# Altium PCB 595模块 外形及尺寸.PcbDoc
Units mm, origin at the board's own origin, x right, y up, seen from the top; angles counter-clockwise.
Board outline 120.14 x 102.49 mm, 2 copper layers (Top Layer, Bottom Layer); 25 components, 0 nets, 226 pads, 0 vias.
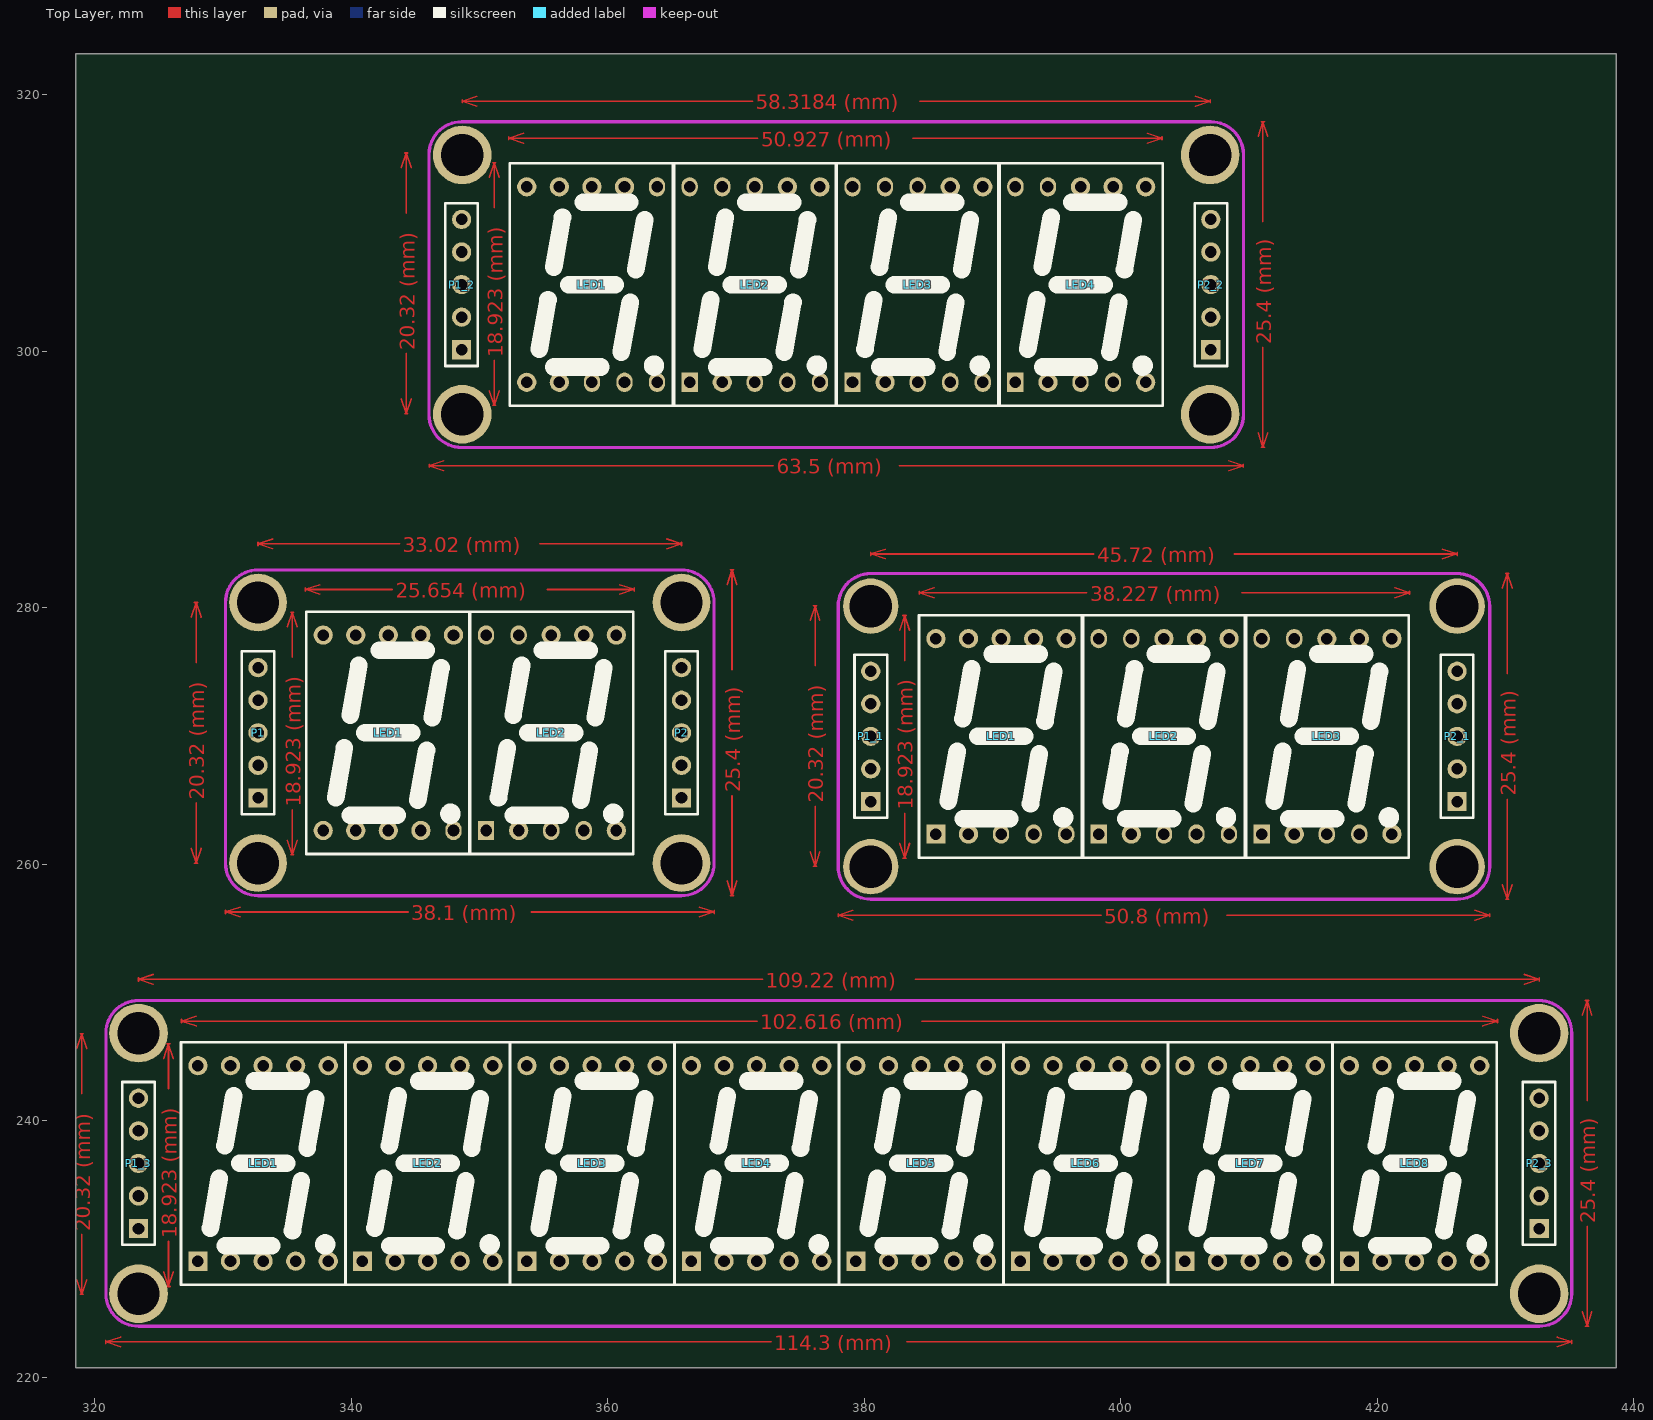
[diagram p0: Top Layer view]
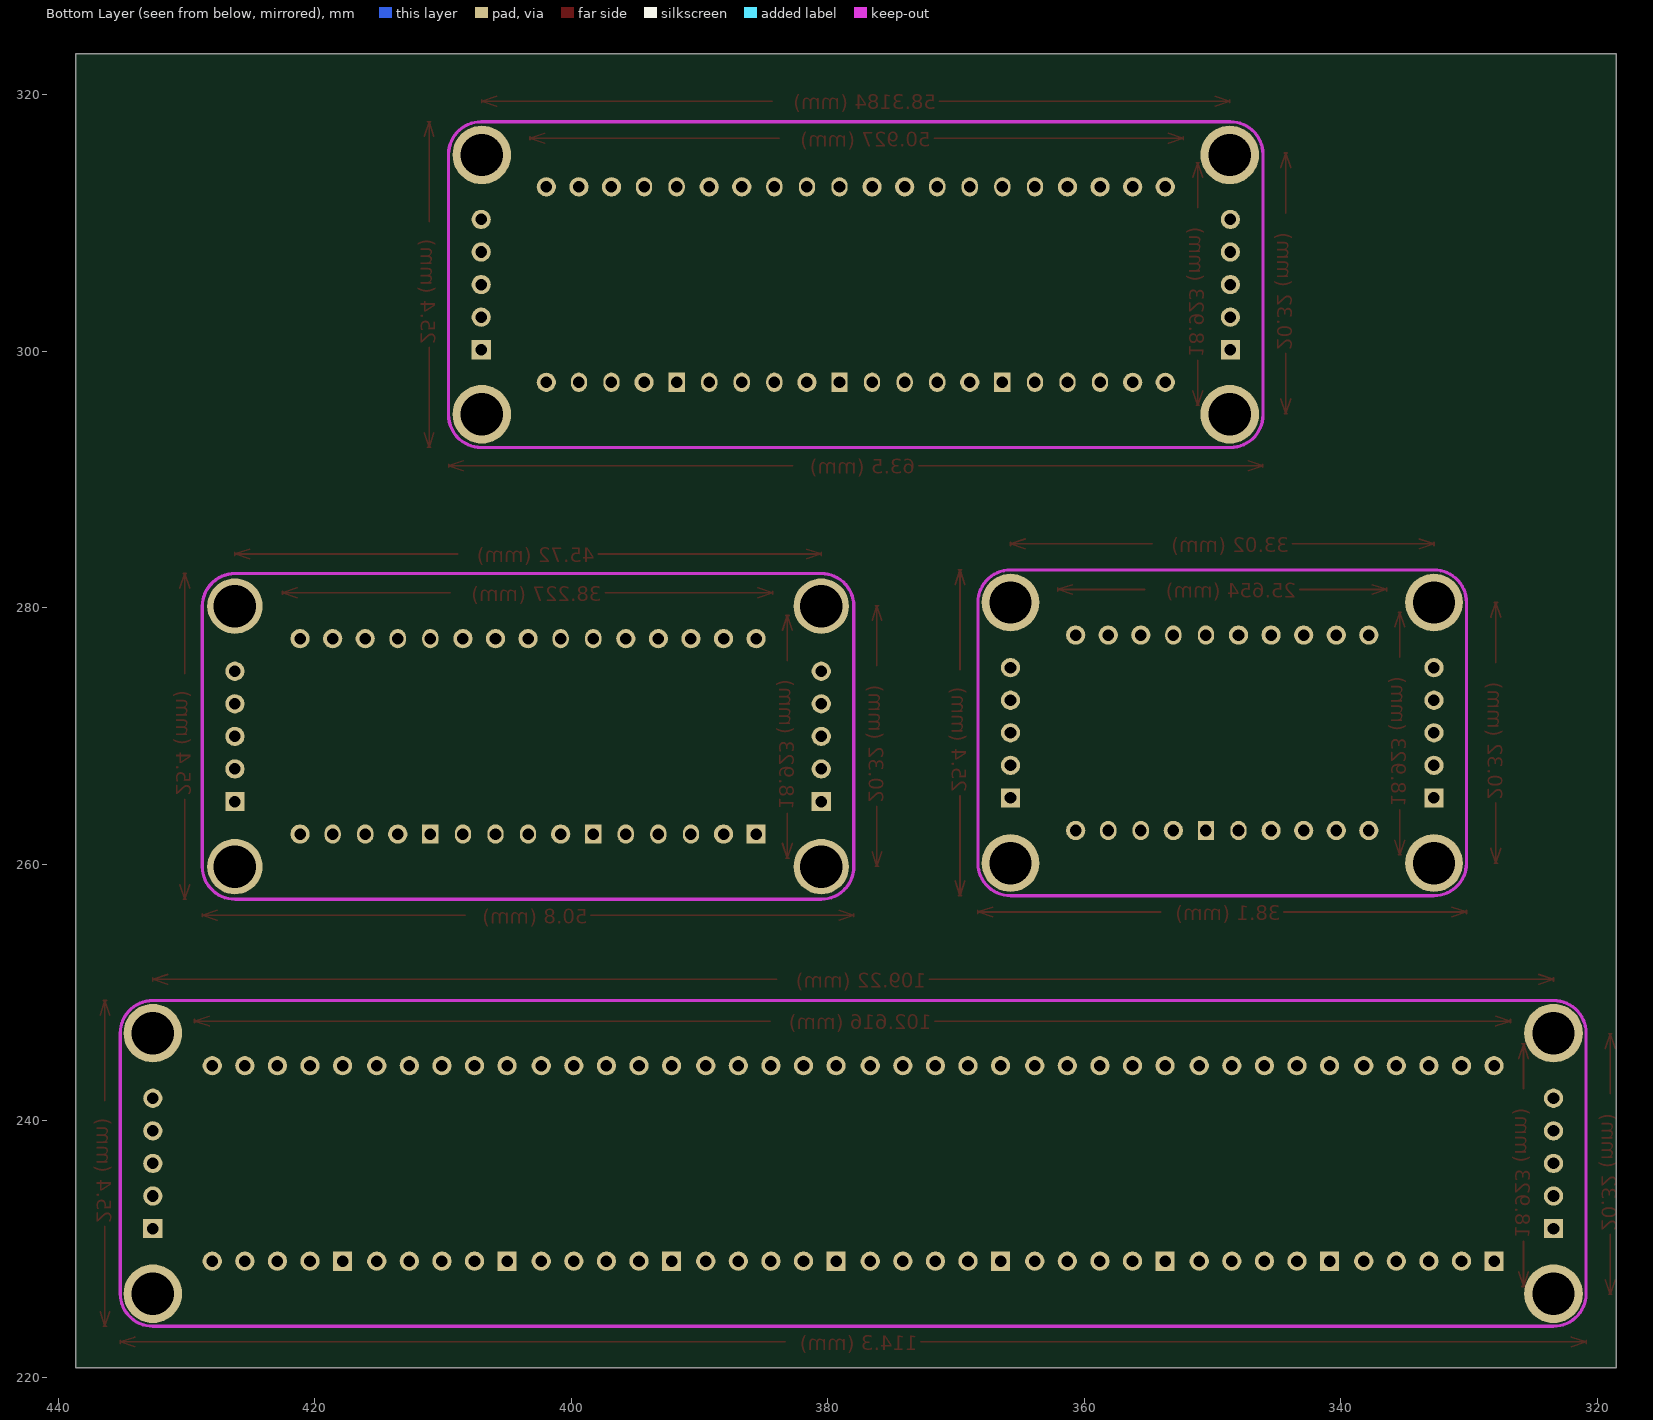
[diagram p1: Bottom Layer view, seen from below]

## Layer stack, top to bottom
Top Layer: signal copper 0.0356
Dielectric: dielectric 0.32, FR-4, Dk 4.8
Bottom Layer: signal copper 0.0356

## Board outline
318.516,323.215 438.658,323.215 438.658,220.726 318.516,220.726 318.516,323.215

## Design rules (kind name [scope] priority, off if disabled: settings)
Clearance [All] p1: gap=0.254
PolygonConnect [All] p1: connectstyle=Relief reliefconductorwidth=0.254 reliefentries=4 polygonreliefangle="90 Angle"
RoutingVias [All] p1: holewidth=0.711 width=1.27 viastyle="Through Hole" minholewidth=0.711 minwidth=1.27 maxholewidth=0.711 maxwidth=1.27
SilkscreenOverComponentPads [All] p1: minsilkscreentomaskgap=0.254
SolderMaskExpansion [All] p1: expansion=0.102
Width [All] p1: maxlimit=0.254 minlimit=0.254 preferedwidth=0.254
27 further rules are at their usual default settings.

## Components (designator, comment, footprint, x,y, rotation, side; value= is the part's Value field where it differs from the comment)
LED1 "数码管" H#1 337.82,262.636 r0 top locked
LED1 "数码管" H#2 385.597,262.357 r0 top
LED1 "数码管" H#3 353.695,297.586 r0 top locked
LED1 "数码管" H#4 328.054,229.057 r0 top locked
LED2 "数码管" H#5 350.52,262.636 r0 top locked
LED2 "数码管" H#6 398.297,262.357 r0 top
LED2 "数码管" H#7 366.395,297.586 r0 top locked
LED2 "数码管" H#4 340.881,229.057 r0 top locked
LED3 "数码管" H#5 410.997,262.357 r0 top
LED3 "数码管" H#7 379.095,297.586 r0 top locked
LED3 "数码管" H#4 353.708,229.057 r0 top locked
LED4 "数码管" H#5 391.795,297.586 r0 top locked
LED4 "数码管" H#4 366.535,229.057 r0 top locked
LED5 "数码管" H#4 379.362,229.057 r0 top locked
LED6 "数码管" H#4 392.189,229.057 r0 top locked
LED7 "数码管" H#4 405.016,229.057 r0 top locked
LED8 "数码管" H#4 417.843,229.057 r0 top locked
P1 "Header 5" HDR1X5 332.74,265.176 r90 top
P1_1 "Header 5" HDR1X5 380.517,264.897 r90 top (schematic designator P1)
P1_2 "Header 5" HDR1X5 348.615,300.126 r90 top (schematic designator P1)
P1_3 "Header 5" HDR1X5 323.418,231.597 r90 top (schematic designator P1)
P2 "Header 5" HDR1X5 365.76,265.176 r90 top
P2_1 "Header 5" HDR1X5 426.237,264.897 r90 top (schematic designator P2)
P2_2 "Header 5" HDR1X5 407.035,300.126 r90 top locked (schematic designator P2)
P2_3 "Header 5" HDR1X5 432.638,231.597 r90 top (schematic designator P2)

## Footprints (in the part's own frame and the unit in brackets; to place one, negate y for a bottom-side part, rotate by r counter-clockwise, add the part's x,y. Pads: shape width x height; smd on the part's side, far side on the other; paste and mask are expansions set on the pad)
H#1 [mm]
  round 1.5 hole 0.9: 1(0,0) 2(2.54,0) 3(5.08,0) 4(7.62,0) 6(10.16,15.24) 7(7.62,15.24) 8(5.08,15.24) 9(2.54,15.24) 10(0,15.24)
  oval 1.27x1.5 hole 0.9: 5(10.16,0)
  silkscreen extent -1.32,-1.83 11.48,17.07
H#2 [mm]
  rect 1.5x1.5 hole 0.9: 1(0,0)
  round 1.5 hole 0.9: 2(2.54,0) 6(10.16,15.24) 7(7.62,15.24) 8(5.08,15.24) 9(2.54,15.24) 10(0,15.24)
  oval 1.27x1.5 hole 0.9: 3(5.08,0) 4(7.62,0) 5(10.16,0)
  silkscreen extent -1.32,-1.83 11.48,17.07
H#3 [mm]
  round 1.5 hole 0.9: 1(0,0) 2(2.54,0) 7(7.62,15.24) 8(5.08,15.24) 9(2.54,15.24) 10(0,15.24)
  oval 1.27x1.5 hole 0.9: 3(5.08,0) 4(7.62,0) 5(10.16,0) 6(10.16,15.24)
  silkscreen extent -1.32,-1.83 11.48,17.07
H#4 [mm]
  rect 1.5x1.5 hole 0.9: 1(0,0)
  round 1.5 hole 0.9: 2(2.54,0) 3(5.08,0) 4(7.62,0) 5(10.16,0) 6(10.16,15.24) 7(7.62,15.24) 8(5.08,15.24) 9(2.54,15.24) 10(0,15.24)
  silkscreen extent -1.32,-1.83 11.48,17.07
H#5 [mm]
  rect 1.27x1.5 hole 0.9: 1(0,0)
  round 1.5 hole 0.9: 2(2.54,0) 5(10.16,0) 6(10.16,15.24) 7(7.62,15.24) 8(5.08,15.24)
  oval 1.27x1.5 hole 0.9: 3(5.08,0) 4(7.62,0) 9(2.54,15.24) 10(0,15.24)
  silkscreen extent -1.32,-1.83 11.48,17.07
H#6 [mm]
  rect 1.27x1.5 hole 0.9: 1(0,0)
  round 1.5 hole 0.9: 2(2.54,0) 6(10.16,15.24) 7(7.62,15.24) 8(5.08,15.24)
  oval 1.27x1.5 hole 0.9: 3(5.08,0) 4(7.62,0) 5(10.16,0) 9(2.54,15.24) 10(0,15.24)
  silkscreen extent -1.32,-1.83 11.48,17.07
H#7 [mm]
  rect 1.27x1.5 hole 0.9: 1(0,0)
  round 1.5 hole 0.9: 2(2.54,0) 6(10.16,15.24) 7(7.62,15.24)
  oval 1.27x1.5 hole 0.9: 3(5.08,0) 4(7.62,0) 5(10.16,0) 8(5.08,15.24) 9(2.54,15.24) 10(0,15.24)
  silkscreen extent -1.32,-1.83 11.48,17.07
HDR1X5 [mm] "Connector; Header; 5 Position"
  rect 1.5x1.5 hole 0.9: 1(0,0)
  round 1.5 hole 0.9: 2(2.54,0) 3(5.08,0) 4(7.62,0) 5(10.16,0)
  silkscreen extent -1.27,-1.27 11.43,1.27

## Part data
P1 P1_1 P1_2 P1_3 P2 P2_1 P2_2 P2_3: "Header, 5-Pin"

## Free pads (board coordinates)
  round 4.572 hole 3.302: 0(323.418,226.517) 0(323.418,246.837) 0(348.666,295.097) 0(348.666,315.316) 0(406.984,295.097) 0(406.984,315.316) 0(432.638,226.517) 0(432.638,246.837)
  round 4.5 hole 3.302: 0(332.74,260.096) 0(332.74,280.416) 0(365.76,260.096) 0(365.76,280.416)
  round 4.318 hole 3.302: 0(380.517,259.817) 0(380.517,280.137) 0(426.237,259.817) 0(426.237,280.137)

## Nets (pads, with @x,y where several pads share a name; then routed paths per layer and width w, separated by ;. In a path a pad name is that pad's centre, name@x,y a point inside that pad or via, vN(x,y) a via of type N, cw(c..) or ccw(c..) an arc to the next point about the centre after c; other vN are vias at no path point)
pads on no net: LED1.1 LED1.2 LED1.3 LED1.4 LED1.5 LED1.6 LED1.7 LED1.8 LED1.9 LED1.10 LED2.1 LED2.2 LED2.3 LED2.4 LED2.5 LED2.6 LED2.7 LED2.8 LED2.9 LED2.10 LED3.1 LED3.2 LED3.3 LED3.4 LED3.5 LED3.6 LED3.7 LED3.8 LED3.9 LED3.10 LED4.1 LED4.2 LED4.3 LED4.4 LED4.5 LED4.6 LED4.7 LED4.8 LED4.9 LED4.10 LED5.1 LED5.2 LED5.3 LED5.4 LED5.5 LED5.6 LED5.7 LED5.8 LED5.9 LED5.10 LED6.1 LED6.2 LED6.3 LED6.4 LED6.5 LED6.6 LED6.7 LED6.8 LED6.9 LED6.10 LED7.1 LED7.2 LED7.3 LED7.4 LED7.5 LED7.6 LED7.7 LED7.8 LED7.9 LED7.10 LED8.1 LED8.2 LED8.3 LED8.4 LED8.5 LED8.6 LED8.7 LED8.8 LED8.9 LED8.10 P1.1 P1.2 P1.3 P1.4 P1.5 P1_1.1 P1_1.2 P1_1.3 P1_1.4 P1_1.5 P1_2.1 P1_2.2 P1_2.3 P1_2.4 P1_2.5 P1_3.1 P1_3.2 P1_3.3 P1_3.4 P1_3.5 P2.1 P2.2 P2.3 P2.4 P2.5 P2_1.1 P2_1.2 P2_1.3 P2_1.4 P2_1.5 P2_2.1 P2_2.2 P2_2.3 P2_2.4 P2_2.5 P2_3.1 P2_3.2 P2_3.3 P2_3.4 P2_3.5
copper on no net: | length 850.4
  Top Layer w0.125: 318.618,227.607 318.999,226.464 ; 318.618,245.641 318.999,246.784 ; 318.874,226.464 319.124,226.464 ; 318.874,246.784 319.124,246.784 ; 318.999,231.152 318.999,226.464 ; 318.999,242.096 318.999,246.784 ; 319.38,227.607 318.999,226.464 ; 319.38,245.641 318.999,246.784 ; 320.878,222.633 320.878,222.883 ; 322.021,222.377 320.878,222.758 ; 322.021,223.139 320.878,222.758 ; 323.418,250.903 323.418,251.153 ; 324.561,250.647 323.418,251.028 ; 324.561,251.409 323.418,251.028 ; 325.374,228.219 325.755,227.076 ; 325.374,244.856 325.755,245.999 ; 325.63,227.076 325.88,227.076 ; 325.63,245.999 325.88,245.999 ; 325.755,230.589 325.755,227.076 ; 325.755,242.486 325.755,245.999 ; 326.136,228.219 325.755,227.076 ; 326.136,244.856 325.755,245.999 ; 326.771,247.652 326.771,247.902 ; 327.533,261.239 327.914,260.096 ; 327.533,279.273 327.914,280.416 ; 327.789,260.096 328.039,260.096 ; 327.789,280.416 328.039,280.416 ; 327.914,247.396 326.771,247.777 ; 327.914,248.158 326.771,247.777 ; 327.914,264.784 327.914,260.096 ; 327.914,275.728 327.914,280.416 ; 328.295,261.239 327.914,260.096 ; 328.295,279.273 327.914,280.416 ; 330.2,256.161 330.2,256.411 ; 331.343,255.905 330.2,256.286 ; 331.343,256.667 330.2,256.286 ; 332.74,284.863 332.74,285.113 ; 333.883,284.607 332.74,284.988 ; 333.883,285.369 332.74,284.988 ; 335.026,261.874 335.407,260.731 ; 335.026,278.511 335.407,279.654 ; 335.282,260.731 335.532,260.731 ; 335.282,279.654 335.532,279.654 ; 335.407,264.244 335.407,260.731 ; 335.407,276.141 335.407,279.654 ; 335.788,261.874 335.407,260.731 ; 335.788,278.511 335.407,279.654 ; 336.423,281.307 336.423,281.557 ; 337.566,281.051 336.423,281.432 ; 337.566,281.813 336.423,281.432 ; 343.207,281.432 336.423,281.432 ; 343.778,284.988 332.74,284.988 ; 343.916,296.291 344.297,295.148 ; 343.916,314.325 344.297,315.468 ; 344.172,295.148 344.422,295.148 ; 344.172,315.468 344.422,315.468 ; 344.297,299.836 344.297,295.148 ; 344.297,310.78 344.297,315.468 ; 344.444,256.286 330.2,256.286 ; 344.678,296.291 344.297,295.148 ; 344.678,314.325 344.297,315.468 ; 346.075,290.959 346.075,291.209 ; 347.218,290.703 346.075,291.084 ; 347.218,291.465 346.075,291.084 ; 348.666,319.382 348.666,319.632 ; 349.809,319.126 348.666,319.507 ; 349.809,319.888 348.666,319.507 ; 350.774,296.926 351.155,295.783 ; 350.774,313.563 351.155,314.706 ; 351.03,295.783 351.28,295.783 ; 351.03,314.706 351.28,314.706 ; 351.155,299.296 351.155,295.783 ; 351.155,311.193 351.155,314.706 ; 351.536,296.926 351.155,295.783 ; 351.536,313.563 351.155,314.706 ; 352.298,316.486 352.298,316.736 ; 353.441,316.23 352.298,316.611 ; 353.441,316.992 352.298,316.611 ; 354.056,256.286 368.3,256.286 ; 354.722,284.988 365.76,284.988 ; 355.293,281.432 362.077,281.432 ; 360.934,281.051 362.077,281.432 ; 360.934,281.813 362.077,281.432 ; 362.077,281.307 362.077,281.557 ; 364.617,284.607 365.76,284.988 ; 364.617,285.369 365.76,284.988 ; 365.76,284.863 365.76,285.113 ; 367.157,255.905 368.3,256.286 ; 367.157,256.667 368.3,256.286 ; 368.3,256.161 368.3,256.411 ; 369.316,258.699 369.697,257.556 ; 369.316,281.813 369.697,282.956 ; 369.572,257.556 369.822,257.556 ; 369.572,282.956 369.822,282.956 ; 369.697,265.355 369.697,257.556 ; 369.697,275.157 369.697,282.956 ; 370.078,258.699 369.697,257.556 ; 370.078,281.813 369.697,282.956 ; 371.306,319.507 348.666,319.507 ; 371.655,247.777 326.771,247.777 ; 371.718,316.611 352.298,316.611 ; 372.08,251.028 323.418,251.028 ; 372.747,222.758 320.878,222.758 ; 372.924,291.084 346.075,291.084 ; 375.793,260.985 376.174,259.842 ; 375.793,279.019 376.174,280.162 ; 376.049,259.842 376.299,259.842 ; 376.049,280.162 376.299,280.162 ; 376.174,264.53 376.174,259.842 ; 376.174,275.474 376.174,280.162 ; 376.555,260.985 376.174,259.842 ; 376.555,279.019 376.174,280.162 ; 377.977,255.907 377.977,256.157 ; 379.12,255.651 377.977,256.032 ; 379.12,256.413 377.977,256.032 ; 380.517,284.076 380.517,284.326 ; 381.66,283.82 380.517,284.201 ; 381.66,284.582 380.517,284.201 ; 382.726,291.084 409.575,291.084 ; 382.778,261.62 383.159,260.477 ; 382.778,278.257 383.159,279.4 ; 383.034,260.477 383.284,260.477 ; 383.034,279.4 383.284,279.4 ; 383.159,263.99 383.159,260.477 ; 383.159,275.887 383.159,279.4 ; 383.31,222.758 435.178,222.758 ; 383.54,261.62 383.159,260.477 ; 383.54,278.257 383.159,279.4 ; 383.805,316.611 403.225,316.611 ; 383.976,251.028 432.638,251.028 ; 384.302,281.053 384.302,281.303 ; 384.344,319.507 406.984,319.507 ; 384.503,247.777 429.387,247.777 ; 385.445,280.797 384.302,281.178 ; 385.445,281.559 384.302,281.178 ; 397.372,281.178 384.302,281.178 ; 397.905,284.201 380.517,284.201 ; 398.477,256.032 377.977,256.032 ; 402.082,316.23 403.225,316.611 ; 402.082,316.992 403.225,316.611 ; 403.225,316.486 403.225,316.736 ; 405.841,319.126 406.984,319.507 ; 405.841,319.888 406.984,319.507 ; 406.984,319.382 406.984,319.632 ; 408.278,256.032 428.777,256.032 ; 408.432,290.703 409.575,291.084 ; 408.432,291.465 409.575,291.084 ; 408.849,284.201 426.237,284.201 ; 409.459,281.178 422.529,281.178 ; 409.575,290.959 409.575,291.209 ; 410.718,293.649 411.099,292.506 ; 410.718,316.763 411.099,317.906 ; 410.974,292.506 411.224,292.506 ; 410.974,317.906 411.224,317.906 ; 411.099,300.306 411.099,292.506 ; 411.099,310.107 411.099,317.906 ; 411.48,293.649 411.099,292.506 ; 411.48,316.763 411.099,317.906 ; 421.386,280.797 422.529,281.178 ; 421.386,281.559 422.529,281.178 ; 422.529,281.053 422.529,281.303 ; 425.094,283.82 426.237,284.201 ; 425.094,284.582 426.237,284.201 ; 426.237,284.076 426.237,284.326 ; 427.634,255.651 428.777,256.032 ; 427.634,256.413 428.777,256.032 ; 428.244,247.396 429.387,247.777 ; 428.244,248.158 429.387,247.777 ; 428.777,255.907 428.777,256.157 ; 429.387,247.652 429.387,247.902 ; 429.768,258.42 430.149,257.277 ; 429.768,281.534 430.149,282.677 ; 430.024,257.277 430.274,257.277 ; 430.024,282.677 430.274,282.677 ; 430.149,265.076 430.149,257.277 ; 430.149,274.877 430.149,282.677 ; 430.53,258.42 430.149,257.277 ; 430.53,281.534 430.149,282.677 ; 431.495,250.647 432.638,251.028 ; 431.495,251.409 432.638,251.028 ; 432.638,250.903 432.638,251.153 ; 434.035,222.377 435.178,222.758 ; 434.035,223.139 435.178,222.758 ; 435.178,222.633 435.178,222.883 ; 435.991,225.12 436.372,223.977 ; 435.991,248.234 436.372,249.377 ; 436.247,223.977 436.497,223.977 ; 436.247,249.377 436.497,249.377 ; 436.372,231.776 436.372,223.977 ; 436.372,241.578 436.372,249.377 ; 436.753,225.12 436.372,223.977 ; 436.753,248.234 436.372,249.377

## Keep-outs
Keep-Out Layer:
  lines w0.254: 426.136,282.677 380.517,282.677 ccw(c380.517,280.137) 377.977,280.137 377.977,259.817 ccw(c380.517,259.817) 380.517,257.277 426.237,257.277 ccw(c426.237,259.817) 428.777,259.817 428.777,280.035 ; 428.777,280.086 ccw(c426.212,280.111) 426.237,282.677 cw(c426.237,280.137) 428.777,280.137 ; 320.878,226.517 ccw(c323.418,226.517) 323.418,223.977 432.638,223.977 ccw(c432.638,226.517) 435.178,226.517 435.178,246.837 ccw(c432.638,246.837) 432.638,249.377 323.418,249.377 ccw(c323.418,246.837) 320.878,246.837 320.878,226.517 ; 330.2,260.096 ccw(c332.74,260.096) 332.74,257.556 365.76,257.556 ccw(c365.76,260.096) 368.3,260.096 368.3,280.416 ccw(c365.76,280.416) 365.76,282.956 332.74,282.956 ccw(c332.74,280.416) 330.2,280.416 330.2,260.096 ; 346.075,295.046 ccw(c348.615,295.046) 348.615,292.506 407.035,292.506 ccw(c407.035,295.046) 409.575,295.046 409.575,315.366 ccw(c407.035,315.366) 407.035,317.906 348.615,317.906 ccw(c348.615,315.366) 346.075,315.366 346.075,295.046

## Other copper
Top Layer:
  text "58.3184 (mm)" at 371.56,318.859 h1.14
  text "50.927 (mm)" at 371.972,315.963 h1.14
  text "25.4 (mm)" at 411.747,300.56 h1.14 r90
  text "20.32 (mm)" at 344.945,300.09 h1.14 r90
  text "18.923 (mm)" at 351.803,299.55 h1.14 r90
  text "63.5 (mm)" at 373.178,290.436 h1.14
  text "33.02 (mm)" at 344.032,284.34 h1.14
  text "45.72 (mm)" at 398.159,283.553 h1.14
  text "25.654 (mm)" at 343.461,280.784 h1.14
  text "38.227 (mm)" at 397.626,280.53 h1.14
  text "25.4 (mm)" at 370.345,265.609 h1.14 r90
  text "25.4 (mm)" at 430.797,265.33 h1.14 r90
  text "20.32 (mm)" at 328.562,265.038 h1.14 r90
  text "20.32 (mm)" at 376.822,264.784 h1.14 r90
  text "18.923 (mm)" at 336.055,264.498 h1.14 r90
  text "18.923 (mm)" at 383.807,264.244 h1.14 r90
  text "38.1 (mm)" at 344.698,255.638 h1.14
  text "50.8 (mm)" at 398.731,255.384 h1.14
  text "109.22 (mm)" at 372.334,250.381 h1.14
  text "102.616 (mm)" at 371.909,247.129 h1.14
  text "25.4 (mm)" at 437.02,232.03 h1.14 r90
  text "20.32 (mm)" at 319.646,231.406 h1.14 r90
  text "18.923 (mm)" at 326.403,230.843 h1.14 r90
  text "114.3 (mm)" at 373.001,222.11 h1.14